# Altium PCB PCB.pcbdoc (part 3 of 3)
Units mil, origin at the board's own origin, x right, y up, seen from the top; angles counter-clockwise.
Board outline 1969.98 x 1969.75 mil, 6 copper layers (Top Layer, GND1, Inner2, PWR3, Inner4, Bottom Layer); 155 components, 199 nets, 988 pads, 612 vias.
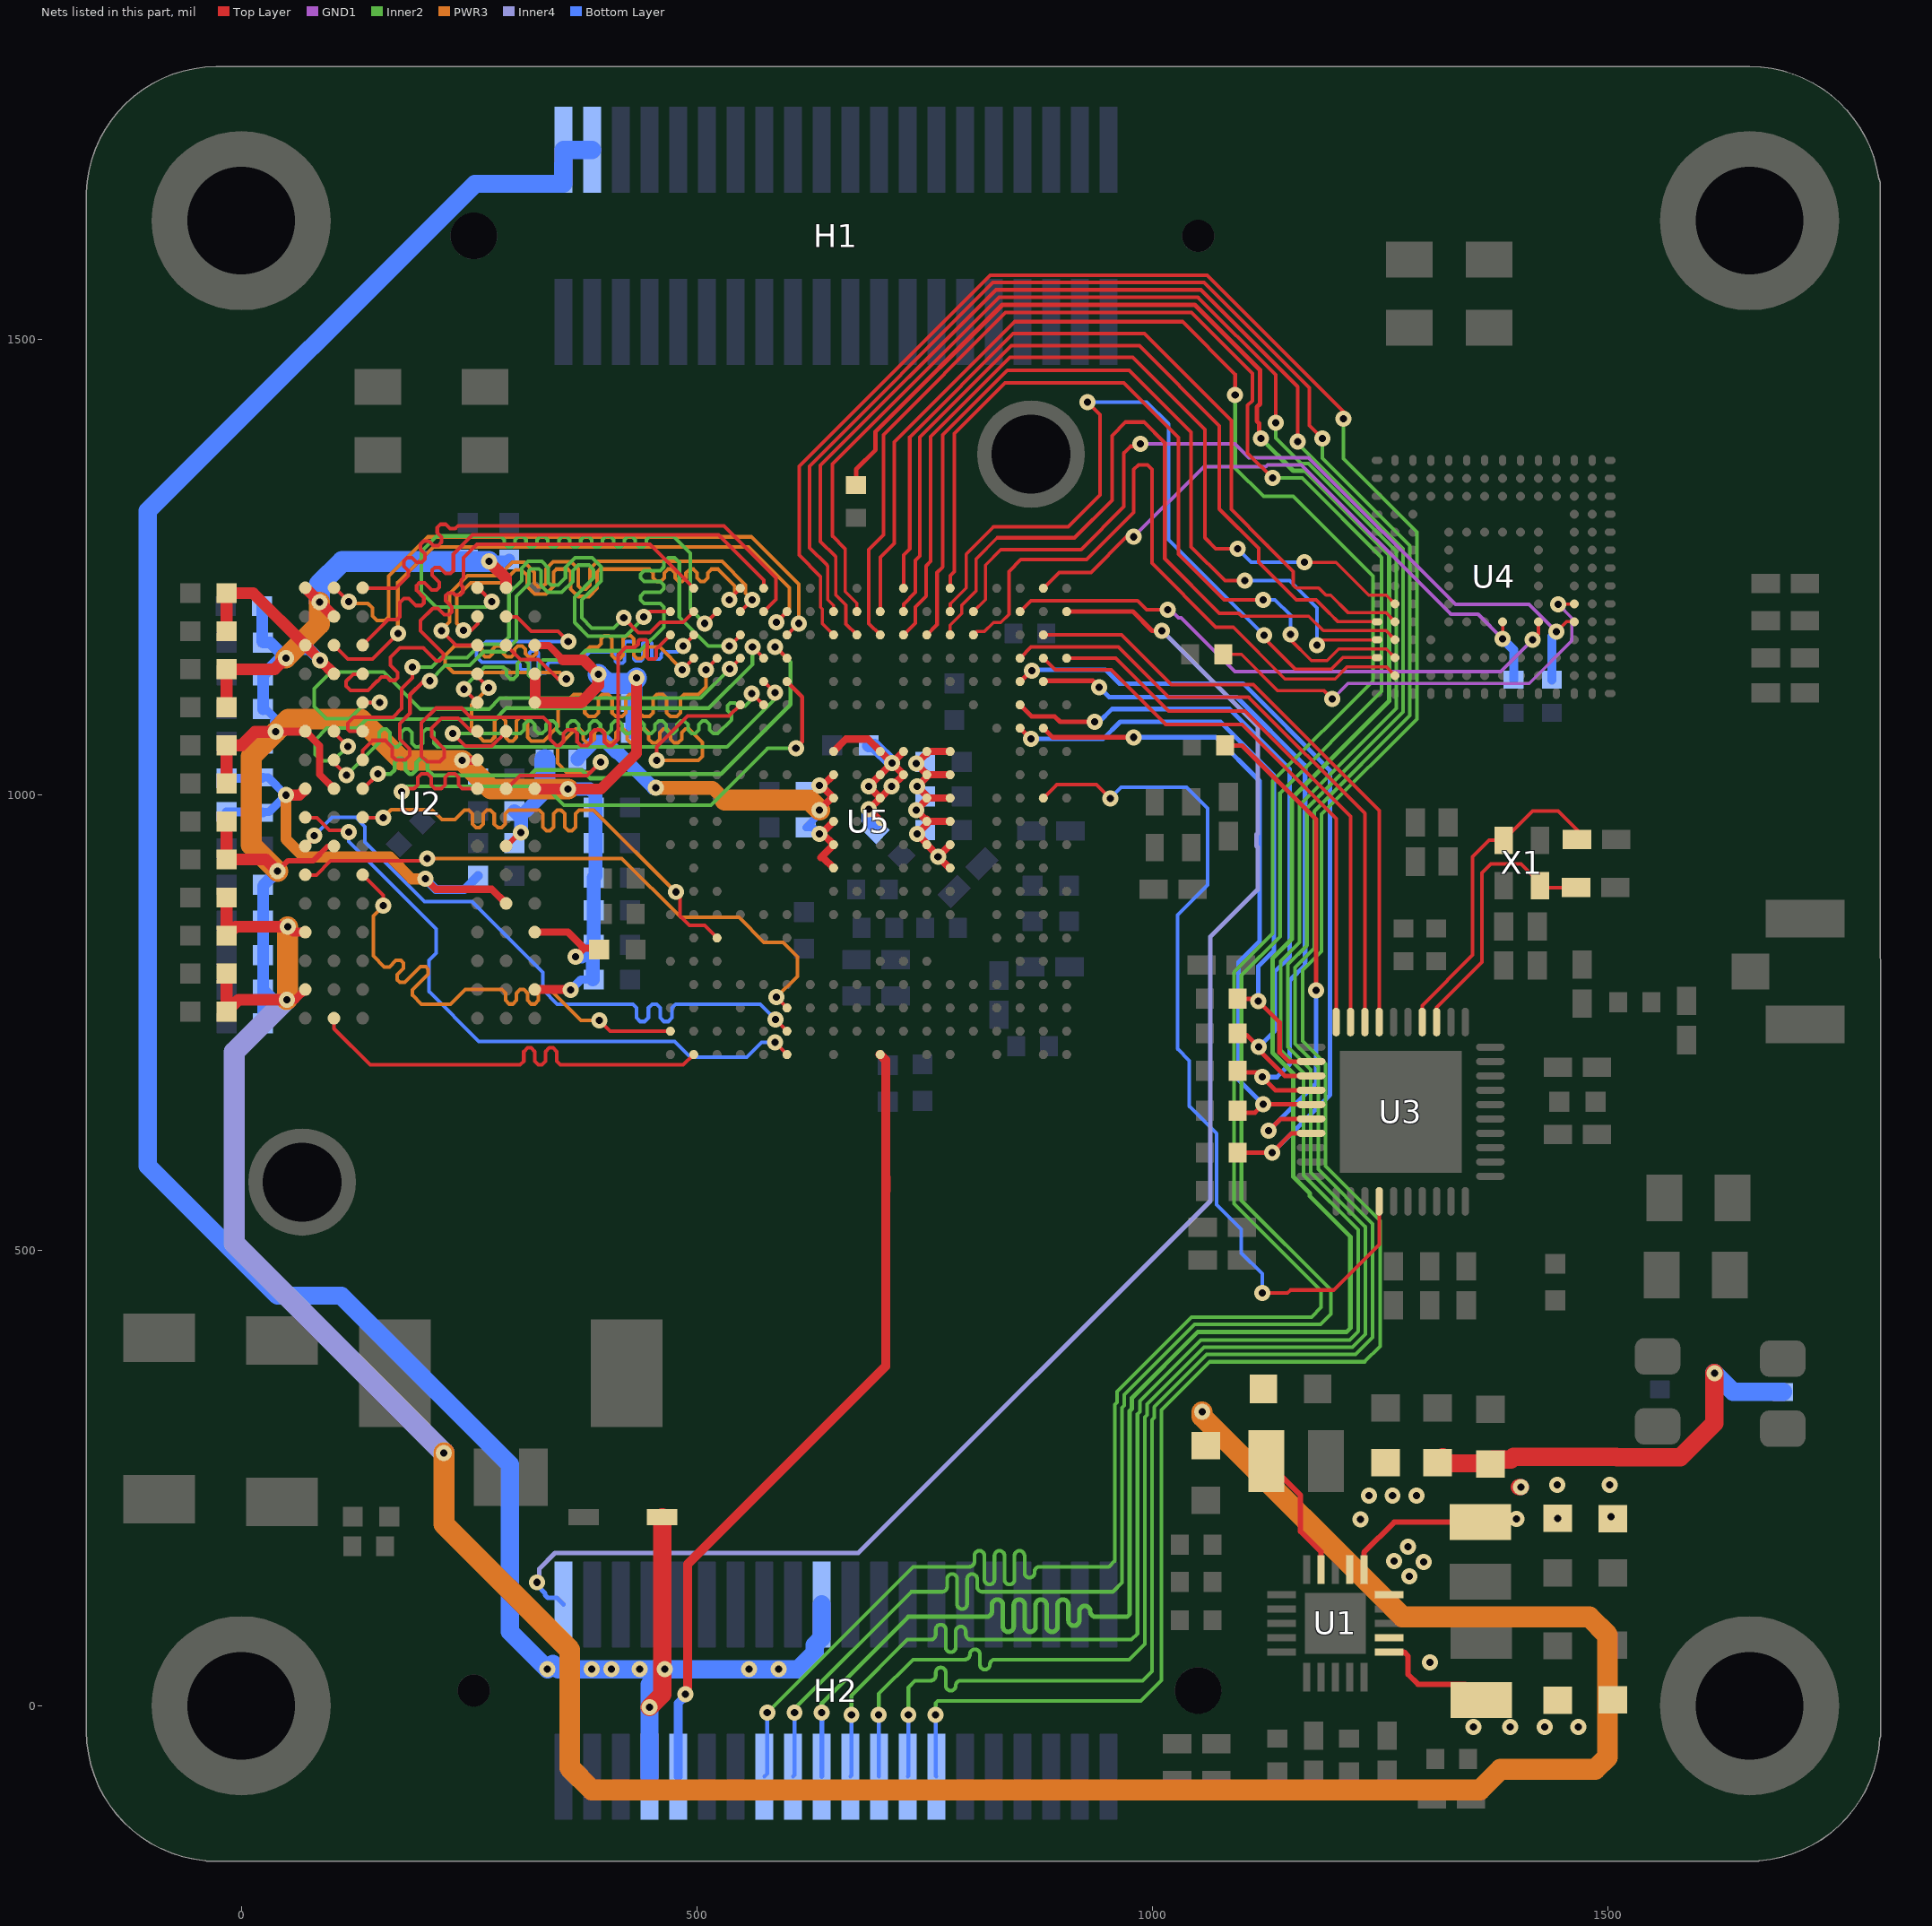
[diagram p7: the nets of this part, all layers, seen from the top]

## Via types
v1: diameter 17.7, hole 7.91, Top Layer to Bottom Layer, tented both sides, 612 vias

## Nets (pads, with @x,y where several pads share a name; then routed paths per layer and width w, separated by ;. In a path a pad name is that pad's centre, name@x,y a point inside that pad or via, vN(x,y) a via of type N, cw(c..) or ccw(c..) an arc to the next point about the centre after c; other vN are vias at no path point) (continued)
SCS1: U2.L1 U5.N19 | length 662.6
  Top Layer w4: U2.L1@70.72,911.72 82.46,911.72 97.95,927.22 201.22,927.22 v1(204,930) ; v1(587.68,777.63) U5.N19@599.26,766.06
  PWR3 w4: v1(204,930) 418,930 482.78,865.22 546.78,865.22 574,838 594.8,838 610.65,822.15 610.65,800.6 v1(587.68,777.63)
SDC0_CLK: H2.21 R13.1 | length 2998.1
  Top Layer w5: R13.1@675,1340 675,1357.02 696.5,1378.52 696.5,1398.52 835.62,1537.64 1046.88,1537.64 1118.5,1466.02 1118.5,1428.98 1115,1425.48 1115,1410.05 1117.5,1407.55 1117.5,1393.05 v1(1119.35,1391.2)
  Inner2 w5: v1(637.5,-7.5) 637.5,2.5 732.5,97.5 815.68,97.5 818.18,97.5 ccw(c818.18,103.5) 824.18,103.5 824.18,110.5 cw(c830.18,110.5) 836.18,110.5 836.18,87 ccw(c842.18,87) 848.18,87 848.18,110.5 cw(c854.18,110.5) 860.18,110.5 860.18,87 ccw(c866.18,87) 872.18,87 872.18,110.5 cw(c878.18,110.5) 884.18,110.5 884.18,87 ccw(c890.18,87) 896.18,87 896.18,110.5 cw(c902.18,110.5) 908.18,110.5 908.18,93.64 ccw(c914.18,93.64) 920.18,93.64 920.18,103.5 cw(c926.18,103.5) 932.18,103.5 ccw(c938.18,103.5) 938.18,97.5 972.5,97.5 975.5,100.5 975.5,323.66 977.98,326.15 977.98,337.94 1050.04,410 1213.33,410 1217.78,414.45 1217.78,514.72 1173.35,559.15 1173.35,562.36 1155,580.71 1155,693.99 1132.35,716.64 1132.35,820.33 1153.5,841.48 1153.5,996 1260.15,1102.65 1260.15,1263.66 1168.31,1355.5 1155.05,1355.5 v1(1119.35,1391.2)
  Bottom Layer w5: H2.21@637.24,-77.76 637.5,-77.5 v1(637.5,-7.5)
SDC0_CMD: H2.17 U5.K3 | length 2998.1
  Top Layer w3.5: 652,1262 653,1261 653,1219 664,1208
  Top Layer w4: 652,1262 636,1278 636,1361.36 828.79,1554.14 1053.71,1554.14 1160,1447.86 v1(1160,1387.5) ; 664,1208 664,1187.36 U5.K3@675.97,1175.4
  Inner2 w4: v1(700,-10) 700,13.14 737.5,50.64 792.5,50.64 794.5,50.64 ccw(c794.5,56.14) 800,56.14 800,56.39 cw(c805.5,56.39) 811,56.39 811,45.14 ccw(c816.5,45.14) 822,45.14 cw(c827.5,45.14) 827.5,50.64 957.5,50.64 975,50.64 992,67.64 992,316.83 994.48,319.31 994.48,331.11 1056.87,393.5 1220.17,393.5 1234.28,407.61 1234.28,525.59 1174.36,585.52 1174.36,697.97 1149.15,723.18 1149.15,813.79 1170,834.64 1170,985.13 1275.65,1090.78 1275.65,1270.08 1160,1385.73 v1(1160,1387.5)
  Bottom Layer w4: v1(700,-10) 700,-77.53 H2.17@700.23,-77.76
SDC0_D0: H2.23 U5.J3 | length 2998.7
  Top Layer w4: U5.J3@701.57,1175.4 689,1187.96 689,1269 705,1285 705,1395 839.14,1529.14 1043.36,1529.14 1110,1462.5 1110,1432.5 1105,1427.5 1105,1375 v1(1132.5,1347.5)
  Inner2 w4: v1(607.5,-7.5) 607.5,-3 735.5,125 769.5,125 ccw(c769.5,130.5) 775,130.5 775,139 cw(c780.5,139) 786,139 786,111.5 ccw(c791.5,111.5) 797,111.5 797,138.91 cw(c802.5,138.91) 808,138.91 808,130.5 ccw(c813.5,130.5) 813.5,125 956.91,125 967,135.09 967,327.19 969.48,329.67 969.48,341.46 1046.52,418.5 1185,418.5 1196.25,429.75 1196.25,456.25 1098.16,554.34 1098.16,801.84 1140.5,844.19 1140.5,1001.79 1252.15,1113.44 1252.15,1260.35 1165,1347.5 v1(1132.5,1347.5)
  Bottom Layer w4: H2.23@605.75,-77.76 607.5,-76.01 v1(607.5,-7.5)
SDC0_D1: H2.25 U5.J2 | length 2999.2
  Top Layer w4: U5.J2@701.57,1200.99 701.57,1260.57 717,1276 717,1387 849.24,1519.24 1033.26,1519.24 1091.25,1461.25 v1(1091.25,1438.75)
  Inner2 w4: v1(577.5,-7.5) 737.5,152.5 799.5,152.5 ccw(c799.5,158) 805,158 805,164.5 cw(c810.5,164.5) 816,164.5 816,138.5 ccw(c821.5,138.5) 827,138.5 827,164.5 cw(c832.5,164.5) 838,164.5 838,138.5 ccw(c843.5,138.5) 849,138.5 849,164.5 cw(c854.5,164.5) 860,164.5 860,145.94 ccw(c865.5,145.94) 871,145.94 871,147 cw(c876.5,147) 876.5,152.5 952.5,152.5 959,159 959,330.5 961.48,332.98 961.48,344.78 1043.2,426.5 1175,426.5 1185.59,437.09 1185.59,455.59 1090.16,551.03 1090.16,805.16 1132.5,847.5 1132.5,1015 1242.5,1125 1242.5,1240 1155,1327.5 1122.5,1327.5 1091.25,1358.75 v1(1091.25,1438.75)
  Bottom Layer w4: H2.25@574.25,-77.76 577.5,-74.51 v1(577.5,-7.5)
SDC0_D2: H2.13 U5.L3 | length 2998.3
  Top Layer w3.5: 635.5,1240 636,1239.5 636,1205.76 638,1203.76 638,1187.77 U5.L3@650.38,1175.4
  Top Layer w4: 635.5,1240 612.5,1263 612.5,1360.48 822.16,1570.14 1060.34,1570.14 1210,1420.48 v1(1210,1412.5)
  Inner2 w4: v1(762.5,-10) 762.5,2.66 764.84,5 987.5,5 1010.48,27.98 1010.48,324.48 1063.5,377.5 1233.46,377.5 1250.28,394.32 1250.28,532.22 1190.36,592.14 1190.36,704.6 1165.15,729.8 1165.15,807.17 1186,828.02 1186,978.5 1290.65,1083.15 1290.65,1288.06 1210,1368.71 v1(1210,1412.5)
  Bottom Layer w4: v1(762.5,-10) 762.5,-77.03 H2.13@763.23,-77.76
SDC0_D3: H2.15 U5.L2 | length 2998.3
  Top Layer w3.5: 643,1252 644,1251 644,1214 650.38,1207.62 U5.L2@650.38,1200.99
  Top Layer w4: 643,1252 624,1271 624,1360.67 825.47,1562.14 1057.03,1562.14 1172.5,1446.67 1172.5,1405.29 v1(1186.98,1390.81)
  Inner2 w4: v1(732.5,-10) 732.5,20.14 739.86,27.5 755,27.5 757,27.5 ccw(c757,33) 762.5,33 762.5,36.45 cw(c768,36.45) 773.5,36.45 773.5,22 ccw(c779,22) 784.5,22 cw(c790,22) 790,27.5 967.5,27.5 989.65,27.5 1000,37.85 1000,313.52 1002.48,316 1002.48,327.8 1060.19,385.5 1223.48,385.5 1242.28,404.3 1242.28,528.91 1182.36,588.83 1182.36,701.28 1157.15,726.49 1157.15,810.48 1178,831.33 1178,981.81 1283.15,1086.96 1283.15,1273.19 1186.98,1369.36 v1(1186.98,1390.81)
  Bottom Layer w4: H2.15@731.73,-77.76 732.5,-76.99 v1(732.5,-10)
SDC0_DET: H2.19 U5.K2 | length 2998.5
  Top Layer w3.5: 663,1270 663,1223 675.97,1210.03 U5.K2@675.97,1200.99
  Top Layer w4: 663,1270 649,1284 649,1363.04 832.1,1546.14 1050.4,1546.14 1135.65,1460.89 v1(1135.65,1408.15)
  Inner2 w4: v1(670,-10) 670,11.14 731.36,72.5 755,72.5 757,72.5 ccw(c757,78) 762.5,78 762.5,83.5 cw(c768,83.5) 773.5,83.5 773.5,64.14 ccw(c779,64.14) 784.5,64.14 784.5,81.41 cw(c790,81.41) 795.5,81.41 795.5,78 ccw(c801,78) 801,72.5 822.5,72.5 977.5,72.5 984,79 984,320.14 986.48,322.62 986.48,334.42 1053.56,401.5 1216.86,401.5 1226.28,410.92 1226.28,522.28 1166.36,582.2 1166.36,694.66 1141.15,719.86 1141.15,817.11 1162,837.96 1162,988.44 1268.15,1094.59 1268.15,1266.98 1171.63,1363.5 1163.71,1363.5 1135.65,1391.56 v1(1135.65,1408.15)
  Bottom Layer w4: H2.19@668.74,-77.76 670,-76.5 v1(670,-10)
SDC1_CLK: R14.1 U3.16 | length 549.1
  Top Layer w5: R14.1@1080,1054 1099,1054 1180,973 v1(1180,785) ; v1(1128,631) 1141.13,644.13 U3.16@1174.6,644.13
  Bottom Layer w5: v1(1128,631) 1180,683 v1(1180,785)
SDC1_CMD: R21.2 U3.12 U5.C7 | length 697.2
  Top Layer w5: U5.C7@855.11,1073.04 v1(867,1061.14) v1@867,1061 ; R21.2@1094,776 1114,776 1140,750 1140,717 1149.88,707.12 U3.12@1174.6,707.12
  Bottom Layer w5: v1(867,1061.14) 946.14,1061.14 965,1080 1075,1080 1134,1021 1134,937.01 ; v1(1116.78,773.22) 1116.78,811.78 1134,829 1134,934.65
SDC1_D0: R22.2 U3.13 U5.C6 | length 756.7
  Top Layer w5: U5.C6@855.11,1098.63 867.73,1086 893,1086 899,1080 v1(937,1080) ; R22.2@1094,736 1104,736 v1(1117,723) 1117,720 1145.63,691.37 U3.13@1174.6,691.37
  Bottom Layer w5: v1(937,1080) 942,1080 956,1094 1085,1094 1151,1028 1151,822 1135,806 1135,741 v1(1117,723)
SDC1_D1: R23.2 U3.14 U5.B5 | length 785.6
  Top Layer w5: U5.B5@880.7,1124.22 881.48,1125 935,1125 v1(942,1118) ; R23.2@1094,695 1116,695 1135.38,675.62 U3.14@1174.6,675.62
  Bottom Layer w5: v1(942,1118) 953,1107 1093,1107 1168,1032 1168,813 1151,796 1151,704 1137,690 v1(1121,690)
SDC1_D2: R24.2 U3.17 U5.C5 | length 927
  Top Layer w5: U5.C5@855.11,1124.22 855.64,1124.22 867.44,1136.02 v1(867.98,1136.02) ; R24.2@1094.01,608 1095.01,607 v1(1132,607) 1153.38,628.38 U3.17@1174.6,628.38
  Bottom Layer w5: v1(867.98,1136.02) 868.96,1137 949,1137 964,1122 1100,1122 1195.35,1026.65 1195.35,670.35 v1(1132,607)
SDC1_D3: R25.2 U3.15 U5.B7 | length 721.4
  Top Layer w5: U5.B7@880.7,1073.04 890.73,1063 v1(980,1063) ; R25.2@1094,651 1113,651 v1(1122,660) 1174.47,660 U3.15@1174.6,659.87
  Bottom Layer w5: v1(980,1063) 1070,1063 1118,1015 1118,839 1095,816 1095,687 v1(1122,660)
SDC2_CLK: R12.1 U4.M6 | length 493.8
  Top Layer w3.5: R12.1@1078,1154 1098,1154 1138,1114 1189,1114 v1(1198,1105) ; v1(1446,1209) 1463.11,1209 U4.M6@1463.59,1209.48
  GND1 w3.5: v1(1198,1105) 1215,1122 1414,1122 1461,1169 1461,1194 v1(1446,1209)
SDC2_CMD: R50.2 U4.M5 U5.E2 | length 937.5
  Top Layer w3.5: U5.E2@803.93,1200.99 817,1214.06 817,1252 834,1269 ; v1(1444,1179) 1454.78,1189.78 U4.M5@1463.59,1189.78
  Top Layer w4: 834,1269 922,1269 969,1316 969,1375 976.38,1382.38 984.53,1382.38 v1(987.15,1385)
  GND1 w4: v1(987.15,1385) 1091.21,1385 1106.17,1370.04 1115,1370.04 1171.96,1370.04 1333,1209 1414,1209 v1(1444,1179)
  Bottom Layer w10: R50.2@1439,1126 1439,1174 v1(1444,1179)
SDC2_D0: U4.A3 U5.F2 | length 872.8
  Top Layer w3.5: 778.34,1209.34 796,1227 796,1264 826,1294 ; v1(1123,1175) 1123,1172 1157,1138 1197,1138 1209.41,1150.41 U4.A3@1247.05,1150.41
  Top Layer w4: U5.F2@778.34,1200.99 778.34,1209.34 ; 826,1294 908,1294 943,1329 943,1417 v1(929,1431)
  Bottom Layer w4: v1(929,1431) 994,1431 1018,1407 1018,1280 v1(1123,1175)
SDC2_D1: U4.A4 U5.G3 | length 958.5
  Top Layer w3.5: v1(1181,1164) 1187,1170 1246.94,1170 U4.A4@1247.05,1170.1
  Top Layer w4: U5.G3@752.75,1175.4 764,1186.65 764,1244 770,1250 770,1394.75 841.25,1466 975,1466 1043,1398 1043,1272 1080,1235 v1(1102,1235)
  Bottom Layer w4: v1(1102,1235) 1151,1235 1181,1205 v1(1181,1164)
SDC2_D2: U4.A5 U5.H2 | length 930.6
  Top Layer w3.5: 1195,1199 1204.22,1189.78 U4.A5@1247.05,1189.78
  Top Layer w4: U5.H2@727.16,1200.99 727.16,1209.16 740,1222 740,1257 745,1262 745,1392.37 845.63,1493 986,1493 1074,1405 1074,1313.5 1117.2,1270.3 1117.2,1255.08 1158.27,1214 1180,1214 1195,1199
SDC2_D3: U4.B2 U5.E3 | length 762.4
  Top Layer w3.5: 807.53,1179 816,1179 826,1189 834,1189 843,1198 843,1245 ; 1089,1184 1146,1127 1201,1127 1214.46,1140.46 1257.01,1140.46 U4.B2@1266.73,1130.73
  Top Layer w4: U5.E3@803.93,1175.4 807.53,1179 ; 843,1245 856,1258 928,1258 980,1310 980,1357 985,1362 995,1362 1000,1357 1000,1254 1070,1184 1089,1184
SDC2_D4: U4.B3 U5.F1 | length 905
  Top Layer w3.5: v1(1152,1176) 1152,1170 1175,1147 1192,1147 1205,1160 1257.15,1160 U4.B3@1266.73,1150.41
  Top Layer w4: U5.F1@778.34,1226.59 778.34,1240.34 783,1245 783,1396.43 838.57,1452 969,1452 1029,1392 1029,1264 1079,1214 v1(1122,1214)
  Bottom Layer w4: v1(1122,1214) 1135,1214 1152,1197 v1(1152,1176)
SDC2_D5: U4.B4 U5.F3 | length 832.3
  Top Layer w3.5: U5.F3@778.34,1175.4 778.34,1186.14 791,1198.8 791,1208 807,1224 807,1259 830,1282 ; 1098.21,1196 1172,1196 1188,1180 1256.84,1180 U4.B4@1266.73,1170.1
  Top Layer w4: 830,1282 915,1282 956,1323 956,1394 971,1409 991,1409 1014,1386 1014,1259 1074,1199 1095.21,1199 1098.21,1196
SDC2_D6: U4.B5 U5.H1 | length 945.5
  Top Layer w3.5: 1155,1230 1158,1227 1183,1227 1191,1219 1196,1219 1215,1200 1256.52,1200 U4.B5@1266.73,1189.78
  Top Layer w4: U5.H1@727.16,1226.59 727.16,1263.16 734,1270 734,1392.69 847.31,1506 991.58,1506 1087,1410.58 1087,1313.23 1126.2,1274.03 1126.2,1273.8 1155,1245 1155,1230
SDC2_D7: U4.B6 U5.H3 | length 957.7
  Top Layer w3.5: v1(1167.18,1255.15) 1167.32,1255 1202,1255 1238,1219 1257.21,1219 U4.B6@1266.73,1209.48
  Top Layer w4: U5.H3@727.16,1175.4 740,1188.24 740,1206 752,1218 752,1251 757,1256 757,1393.06 843.94,1480 979,1480 1058,1401 1058,1282 1070,1270 v1(1093.85,1270)
  Bottom Layer w4: v1(1093.85,1270) 1108.85,1255 1167.03,1255 v1(1167.18,1255.15)
SDC2_DS: R51.2 U4.H5 U5.B1 | length 708.4
  Top Layer w3.5: U4.H5@1384.85,1189.78 1385,1189.63 v1(1385,1171)
  Top Layer w4: U5.B1@880.7,1226.59 898.11,1244 933,1244 972,1283 v1(980,1283)
  GND1 w4: v1(980,1283) 1057,1360 1115,1360 1124.71,1360 1126.74,1362.04 1163.96,1362.04 1328,1198 1358,1198 v1(1385,1171)
  Bottom Layer w10: v1(1385,1171) 1397,1159 R51.2@1397,1126
SDC2_RST: U4.K5 U5.C2 | length 637
  Top Layer w3.5: v1(1418,1170) 1424.22,1176.22 U4.K5@1424.22,1189.78
  Top Layer w4: U5.C2@855.11,1200.99 867.12,1213 984,1213 994,1203 v1(1017.15,1203)
  GND1 w4: v1(1017.15,1203) 1020.17,1203 1029.16,1194.01 1031.99,1194.01 1091,1135 1383,1135 v1(1418,1170)
SDQ0: U2.A2 U5.N3 | length 676.8
  Top Layer w4: U2.A2@102.21,1226.68 103.32,1226.68 v1(118,1212) ; U5.N3@599.26,1175.5 599.5,1175.5 v1(612,1188)
  PWR3 w4: v1(118,1212) 120,1210 139,1210 144,1205 144,1196 149,1191 158,1191 162,1195 162,1240 205,1283 560,1283 612,1231 v1(612,1188)
SDQ1: U2.C8 U5.U4 | length 657.5
  Top Layer w4: U2.C8@291.19,1163.69 306.42,1148.46 326.28,1148.46 347.75,1127 v1(357,1127) ; v1@484.27,1137.28 U5.U4@496.9,1149.91
  PWR3 w4: v1(357,1127) 350,1134 233,1134 224,1143 224,1153 234,1163 260.53,1163 264.03,1159.5 264.03,1154.88 267.53,1151.38 272.53,1151.38 276.03,1154.88 276.03,1159.5 279.53,1163 284.53,1163 288.03,1159.5 288.03,1154.88 291.53,1151.38 296.53,1151.38 300.03,1154.88 300.03,1159.5 303.53,1163 308.53,1163 312.03,1159.5 312.03,1154.88 315.53,1151.38 320.53,1151.38 324.03,1154.88 324.03,1159.5 327.53,1163 340,1163 352,1151 372,1151 383,1162 391.64,1162 395.14,1165.5 395.14,1171.02 398.64,1174.52 403.64,1174.52 407.14,1171.02 407.14,1152.98 410.64,1149.48 415.64,1149.48 419.14,1152.98 419.14,1171.02 422.64,1174.52 427.64,1174.52 431.14,1171.02 431.14,1152.98 434.64,1149.48 439.64,1149.48 443.14,1152.98 443.14,1158.5 446.64,1162 459.48,1162 v1(484.27,1137.22)
  other v1: 484.27,1137.22
SDQ2: U2.C2 U5.N2 | length 668.9
  Top Layer w4: U2.C2@102.21,1163.69 116.9,1149 144,1149 v1(172,1177) ; v1(587.39,1189.22) U5.N2@599.26,1201.09
  PWR3 w4: v1(172,1177) 172,1233 211,1272 557,1272 602,1227 602,1203.83 v1(587.39,1189.22)
SDQ3: U2.D7 U5.T4 | length 647.1
  Top Layer w4: U2.D7@259.69,1132.19 259.69,1129.19 v1(271.7,1117.18) ; v1(510.27,1137.22) 510.27,1137.69 U5.T4@522.49,1149.91
  PWR3 w4: v1(271.7,1117.18) 253,1098.48 253,1072 266,1059 274.25,1059 278.25,1063 278.25,1081 282.25,1085 286.25,1085 290.25,1081 290.25,1063 294.25,1059 298.25,1059 302.25,1063 302.25,1081 306.25,1085 310.25,1085 314.25,1081 314.25,1063 318.25,1059 332,1059 348,1075 348,1093 365,1110 373.19,1110 377.19,1106 377.19,1090 381.19,1086 388.19,1086 392.19,1090 392.19,1106 396.19,1110 403.19,1110 407.19,1106 407.19,1090 411.19,1086 418.19,1086 422.19,1090 422.19,1106 426.19,1110 433.19,1110 437.19,1106 437.19,1090 441.19,1086 448.19,1086 452.19,1090 452.19,1106 456.19,1110 463.19,1110 467.19,1106 467.19,1090 471.19,1086 478.19,1086 482.19,1090 482.19,1106 486.19,1110 502,1110 510.27,1118.27 v1(510.27,1137.22)
  other v1: 510.27,1137.22 510.27,1137.22 510.27,1137.22
SDQ4: U2.B8 U5.U3 | length 588.5
  Top Layer w4: U2.B8@291.19,1195.19 302.61,1195.19 318.58,1179.22 347.78,1179.22 v1(359,1168) ; v1(485,1163) 496.9,1174.9 U5.U3@496.9,1175.5
  Bottom Layer w4: v1(359,1168) 269.05,1168 258.27,1157.22 258.27,1151.38 264.11,1145.53 303.94,1145.53 306.28,1143.19 306.28,1139.1 308.28,1137.1 314.28,1137.1 316.28,1139.1 316.28,1155.53 318.28,1157.53 324.28,1157.53 326.28,1155.53 326.28,1135.53 328.28,1133.53 334.28,1133.53 336.28,1135.53 336.28,1143.19 338.63,1145.53 371.77,1145.53 382.86,1156.62 408.58,1156.62 410.92,1154.27 410.92,1146.62 412.92,1144.62 418.92,1144.62 420.92,1146.62 420.92,1166.03 422.92,1168.03 428.92,1168.03 430.92,1166.03 430.92,1149.13 432.92,1147.13 438.92,1147.13 440.92,1149.13 440.92,1166.03 442.92,1168.03 448.92,1168.03 450.92,1166.03 450.92,1150.96 452.92,1148.96 458.92,1148.96 460.92,1150.96 460.92,1154.27 463.27,1156.62 478.62,1156.62 v1(485,1163)
SDQ5: U2.C3 U5.P1 | length 602.6
  Top Layer w4: U2.C3@133.37,1164.08 161.29,1192 171,1192 174,1195 174,1211 178.52,1215.52 184.18,1215.52 192.02,1207.68 197.68,1207.68 200.51,1210.51 200.51,1216.17 192.67,1224.01 192.67,1229.67 195.5,1232.5 201.15,1232.5 209,1224.65 214.65,1224.65 217.48,1227.48 217.48,1233.14 209.64,1240.98 209.64,1246.64 212.47,1249.47 218.12,1249.47 224.59,1243 230,1243 233,1246 233,1264 254,1285 524,1285 573.61,1235.39 U5.P1@573.61,1226.59
SDQ6: U2.A7 U5.T2 | length 668.6
  Top Layer w4: U2.A7@258.56,1226.93 260.07,1226.93 v1(275,1212) ; v1(509,1188) 509.4,1188 U5.T2@522.49,1201.09
  Inner2 w4: v1(275,1212) 269,1206 214,1206 198,1222 198,1267 215,1284 284.75,1284 288.75,1280 288.75,1276 292.75,1272 296.75,1272 300.75,1276 300.75,1280 304.75,1284 308.75,1284 312.75,1280 312.75,1276 316.75,1272 320.75,1272 324.75,1276 324.75,1280 328.75,1284 332.75,1284 336.75,1280 336.75,1276 340.75,1272 344.75,1272 348.75,1276 348.75,1280 352.75,1284 356.75,1284 360.75,1280 360.75,1276 364.75,1272 368.75,1272 372.75,1276 372.75,1280 376.75,1284 380.75,1284 384.75,1280 384.75,1276 388.75,1272 392.75,1272 396.75,1276 396.75,1280 400.75,1284 404.75,1284 408.75,1280 408.75,1276 412.75,1272 416.75,1272 420.75,1276 420.75,1280 424.75,1284 428.75,1284 432.75,1280 432.75,1276 436.75,1272 440.75,1272 444.75,1276 444.75,1280 448.75,1284 474,1284 493,1265 493,1204 v1(509,1188)
  other v1: 509,1188 275,1212
SDQ7: U2.A3 U5.P2 | length 608.7
  Top Layer w4: U2.A3@133.71,1226.68 169.68,1226.68 183.33,1240.33 183.33,1245.98 178.48,1250.83 178.48,1256.48 182.02,1260.02 187.68,1260.02 192.52,1255.18 198.18,1255.18 201.71,1258.71 201.71,1264.37 196.87,1269.21 196.87,1274.87 200.4,1278.4 206.06,1278.4 210.9,1273.56 216.56,1273.56 220.1,1277.1 220.1,1282.75 215.25,1287.6 215.25,1293.25 218.79,1296.79 224.44,1296.79 229.29,1291.94 234.94,1291.94 238,1295 530,1295 587,1238 587,1214.27 585.27,1212.53 585.11,1212.53 U5.P2@573.67,1201.09
SDQ8: U2.G2 U5.P5 | length 642.7
  Top Layer w4: U2.G2@98.96,1037.95 v1(115.45,1021.46) ; U5.P5@573.68,1124.32 v1(586,1112)
  Inner2 w4: v1(115.45,1021.46) 151.44,1057.45 151.44,1068 155.44,1072 159.44,1072 163.44,1068 163.44,1056.22 167.44,1052.22 171.44,1052.22 175.44,1056.22 175.44,1068 179.44,1072 183.44,1072 187.44,1068 187.44,1056.22 191.44,1052.22 195.44,1052.22 199.44,1056.22 199.44,1068 203.44,1072 207.44,1072 211.44,1068 211.44,1056.22 215.44,1052.22 533.22,1052.22 586,1105 v1(586,1112)
  other v1: 586,1112
SDQ9: U2.F7 U5.V3 | length 661.6
  Top Layer w4: U2.F7@259.37,1069.58 252.42,1069.58 238,1084 220,1084 209,1073 209,1064 223,1050 223,1041 218,1036 204,1036 198,1042 198,1079 214,1095 242,1095 252,1085 331.72,1085 339,1077.72 339,1061 346,1054 349.85,1054 353.85,1058 353.85,1067.22 357.85,1071.22 364.85,1071.22 368.85,1067.22 368.85,1058 372.85,1054 379.85,1054 383.85,1058 383.85,1067.22 387.85,1071.22 394.85,1071.22 398.85,1067.22 398.85,1058 402.85,1054 407,1054 414,1061 414,1153.45 422.16,1161.61 432.24,1161.61 435.75,1165.13 435.75,1168.34 437.25,1169.84 444.25,1169.84 445.75,1168.34 445.75,1150.46 447.25,1148.96 454.25,1148.96 455.75,1150.46 455.75,1159.75 U5.V3@471.31,1175.31
SDQ10: U2.F2 U5.P4 | length 635.8
  Top Layer w4: U2.F2@102.04,1069.45 102.04,1067.96 v1(117,1053) ; v1(561.27,1162.31) U5.P4@573.67,1149.91
  Inner2 w4: v1(117,1053) 101,1037 88,1037 81,1044 81,1060 94,1073 128,1073 138,1083 279,1083 291,1095 513.46,1095 561.27,1142.8 v1(561.27,1162.31)
SDQ11: U2.E3 U5.R4 | length 641.4
  Top Layer w4: U2.E3@130.46,1100.94 v1(152.18,1100.94) ; v1(536.39,1138.22) U5.R4@548.08,1149.91
  Inner2 w4: v1(152.18,1100.94) 136.68,1100.94 119.27,1083.53 93.27,1083.53 80.27,1096.53 80.27,1116.53 98.27,1134.53 156.47,1134.53 197,1094 272,1094 284,1106 504.17,1106 v1(536.39,1138.22)
SDQ12: U2.H8 U5.R6 | length 658.9
  Top Layer w4: U2.H8@291.19,1006.21 305.98,1021 379.73,1021 394.51,1035.78 v1(394.59,1035.78) ; v1(456.27,1037.53) 456.27,1052.22 490.27,1086.22 535.57,1086.22 U5.R6@548.08,1098.73
  PWR3 w4: v1(394.59,1035.78) 394.51,1035.78 383.27,1024.53 357.27,1024.53 347.27,1034.53 347.27,1052.22 367.05,1072 371.53,1072 375.53,1068 375.53,1061 379.53,1057 383.53,1057 387.53,1061 387.53,1068 391.53,1072 395.53,1072 399.53,1068 399.53,1061 403.53,1057 407.53,1057 411.53,1061 411.53,1068 415.53,1072 419.53,1072 423.53,1068 423.53,1061 427.53,1057 431.53,1057 435.53,1061 435.53,1068 439.53,1072 443.53,1072 447.53,1068 447.53,1061 451.53,1057 455.53,1057 459.53,1061 459.53,1068 463.53,1072 467.53,1072 471.53,1068 471.53,1061 475.53,1057 479.53,1057 483.53,1061 483.53,1068 487.53,1072 491.8,1072 506.27,1057.53 506.27,1042.03 501.77,1037.53 v1(456.27,1037.53)
  other v1: 456.27,1037.53
SDQ13: U2.H3 U5.N4 | length 652.7
  Top Layer w4.5: U2.H3@133.71,1006.21 v1(150.27,1022.77) ; v1(586.27,1162.22) 586.94,1162.22 U5.N4@599.26,1149.91
  Inner2 w4.5: v1(150.27,1022.77) 163.91,1022.77 168.41,1027.27 168.41,1035.5 172.91,1040 175.91,1040 180.41,1035.5 180.41,1027.27 184.91,1022.77 187.91,1022.77 192.41,1027.27 192.41,1035.5 196.91,1040 199.91,1040 204.41,1035.5 204.41,1027.27 210.68,1021 317,1021 323,1027 374,1027 383,1018 404,1018 408.77,1022.77 526.77,1022.77 603,1099 603,1145.48 v1(586.27,1162.22)
  other v1: 586.27,1162.22
SDQ14: U2.F8 U5.P6 | length 620.7
  Top Layer w4: v1(232.27,1067.22) 246.27,1053.22 275.2,1053.22 U2.F8@291.19,1069.2 ; v1(560.73,1111.08) 573.08,1098.73 U5.P6@573.67,1098.73
  Inner2 w4: v1(232.27,1067.22) 306.42,1067.22 310.42,1071.22 310.42,1077 314.42,1081 318.42,1081 322.42,1077 322.42,1071.22 326.42,1067.22 330.42,1067.22 334.42,1071.22 334.42,1077 338.42,1081 342.42,1081 346.42,1077 346.42,1071.22 350.42,1067.22 354.42,1067.22 358.42,1071.22 358.42,1077 362.42,1081 366.42,1081 370.42,1077 370.42,1071.22 374.42,1067.22 378.42,1067.22 382.42,1071.22 382.42,1077 386.42,1081 390.42,1081 394.42,1077 394.42,1071.22 398.42,1067.22 402.42,1067.22 406.42,1071.22 406.42,1077 410.42,1081 414.42,1081 418.42,1077 418.42,1071.22 422.42,1067.22 426.42,1067.22 430.42,1071.22 430.42,1077 434.42,1081 438.42,1081 442.42,1077 442.42,1071.22 446.42,1067.22 450.42,1067.22 454.42,1071.22 454.42,1077 458.42,1081 462.42,1081 466.42,1077 466.42,1071.22 470.42,1067.22 474.42,1067.22 478.42,1071.22 478.42,1077 482.42,1081 486.42,1081 490.42,1077 490.42,1071.22 494.42,1067.22 498.42,1067.22 502.42,1071.22 502.42,1077 506.42,1081 510.42,1081 514.42,1077 514.42,1071.22 518.42,1067.22 523.22,1067.22 538.19,1082.19 538.19,1087.85 533.9,1092.14 533.9,1097.79 536.73,1100.62 542.38,1100.62 545.89,1097.12 553.12,1097.12 561.62,1105.62 v1@561.62,1109.82
  other v1: 232.27,1067.22
SDQ15: U2.H7 U5.N5 | length 683.7
  Top Layer w4: v1(176,1003) 179.58,1006.58 189.69,1006.58 193.69,1010.58 193.69,1018.77 197.69,1022.77 204.69,1022.77 208.69,1018.77 208.69,1010.58 212.69,1006.58 219.69,1006.58 223.69,1010.58 223.69,1018.77 227.69,1022.77 234.69,1022.77 238.69,1018.77 238.69,1010.58 242.69,1006.58 U2.H7@259.37,1006.58
  Top Layer w4.5: U5.N5@599.2,1124.22 616,1107.41 616,1058 v1(609,1051)
  Inner2 w4: v1(176,1003) 182,1009 334,1009 354.38,988.62 515.62,988.62 578,1051 v1(609,1051)
  other v1: 176,1003
SDQM0: U2.D3 U5.U1 | length 648.5
  Top Layer w4: U2.D3@133.71,1132.19 U2.D3@130.46,1132.19 ; U2.D3@133.71,1132.44 U2.D3@130.46,1132.19 ; U5.U1@496.9,1226.69 448.58,1275 259,1275 244,1260 244,1238 241.47,1235.47 241.47,1229.81 243.33,1227.95 243.33,1222.29 240.5,1219.46 234.85,1219.46 232.98,1221.33 227.33,1221.33 224.5,1218.5 224.5,1212.84 231.2,1206.14 231.2,1200.48 228.37,1197.65 222.71,1197.65 216.01,1204.36 210.36,1204.36 197,1191 197,1180 222,1155 222,1151 218,1147 214,1147 200,1161 174,1161 164,1151 164,1141.83 171.83,1134 171.83,1128.34 169,1125.51 163.34,1125.51 159.76,1129.1 154.1,1129.1 149.4,1124.4 149.27,1124.53 139.27,1114.53 119.87,1114.53 115.27,1119.14 115.27,1124.53 122.93,1132.19 U2.D3@130.46,1132.19
SDQM1: U2.E7 U5.R3 | length 646.4
  Top Layer w4: v1(244.71,1115.68) U2.E7@259.69,1100.7 ; v1(536,1163) 548.08,1175.08 U5.R3@548.08,1175.5
  Inner2 w4: v1(244.71,1115.68) 244.71,1117.71 267,1140 288,1140 291.26,1136.74 291.26,1131 295.26,1127 299.26,1127 303.26,1131 303.26,1144 307.26,1148 311.26,1148 315.26,1144 315.26,1131 319.26,1127 323.26,1127 327.26,1131 327.26,1144 331.26,1148 368,1148 378,1158 438,1158 464,1184 464,1206.01 460,1210.01 442.28,1210.01 438.28,1214.01 438.28,1218.01 442.28,1222.01 460,1222.01 464,1226.01 464,1230.01 460,1234.01 442.28,1234.01 438.28,1238.01 438.28,1242.01 442.28,1246.01 460,1246.01 464,1250.01 464,1255 469,1260 476,1260 481,1255 481,1195 513,1163 v1(536,1163)
  other v1: 244.71,1115.68 536,1163
SDQS0N: U2.B7 U5.R1 | length 563.9
  Top Layer w4: v1(244.27,1180.53) 252.27,1180.53 259.69,1187.96 U2.B7@259.69,1195.19 ; v1(536,1214) 536,1214.61 U5.R1@548.08,1226.69
  PWR3 w4: v1(244.27,1180.53) 236.77,1188.03 236.77,1217.28 252.02,1232.53 286.67,1232.53 301.14,1247 307.61,1247 313.87,1240.73 313.87,1228.81 322.31,1220.38 334.69,1220.38 342.87,1228.56 342.87,1244.48 345.93,1247.53 358.82,1247.53 361.87,1244.48 361.87,1225.81 370.15,1217.53 381.85,1217.53 390.87,1226.56 390.87,1244.48 393.93,1247.53 448.38,1247.53 452.38,1243.53 452.38,1238.01 456.38,1234.01 460.38,1234.01 464.38,1238.01 464.38,1243.53 468.38,1247.53 472.38,1247.53 476.38,1243.53 476.38,1238.01 480.38,1234.01 484.38,1234.01 488.38,1238.01 488.38,1243.53 492.38,1247.53 496.38,1247.53 500.38,1243.53 500.38,1238.01 504.38,1234.01 508.38,1234.01 512.38,1238.01 512.38,1243.53 516.38,1247.53 523.47,1247.53 542,1229 542,1220 v1(536,1214)
  other v1: 536,1214
SDQS0P: U2.C7 U5.R2 | length 562.8
  Top Layer w4: v1(220,1180) 235.92,1164.08 U2.C7@259.37,1164.08 ; U5.R2@548.02,1200.99 v1(561,1214)
  PWR3 w4: v1(220,1180) 220,1181 228.77,1189.77 228.77,1220.59 248.71,1240.53 283.36,1240.53 297.82,1255 310.92,1255 321.87,1244.05 321.87,1232.13 325.62,1228.38 331.38,1228.38 334.87,1231.87 334.87,1247.79 342.62,1255.53 362.13,1255.53 369.87,1247.79 369.87,1229.13 373.47,1225.53 378.53,1225.53 382.87,1229.87 382.87,1247.79 391.08,1256 528,1256 553.77,1230.23 553.77,1221.23 v1(561,1214)
SDQS1N: U2.G3 U5.V2 | length 686.2
  Top Layer w4: U2.G3@133.37,1038.08 133.37,1048.63 144.27,1059.53 158.47,1059.53 166,1052 166,1042 170,1038 180,1038 185,1043 185,1050 174,1061 174,1078.12 185.27,1089.39 185.27,1090.17 ; 185.27,1090.53 185.27,1109.75 200.52,1125 v1(207,1125) ; v1(442,1195) 448.09,1201.09 U5.V2@471.31,1201.09
  Inner2 w4: v1(207,1125) 224,1142 251,1142 266,1157 289.31,1157 302,1169.69 302,1217.69 316,1231.69 316,1245.69 318.31,1248 326.69,1248 329,1245.69 329,1229.69 336.69,1222 352,1222 364,1234 364,1246 370,1252 382,1252 387,1247 387,1238 366,1217 366,1189 381,1174 422,1174 442,1194 v1(442,1195)
SDQS1P: U2.F3 U5.U2 | length 687.6
  Top Layer w4: U2.F3@133.32,1069.53 119.27,1069.53 117.27,1071.53 117.27,1078.53 123.73,1085 166.73,1085 176.27,1094.53 176.27,1116.31 188,1128.04 v1(188,1140) ; v1(420,1194) 436,1178 449,1178 460.22,1189.22 485.03,1189.22 U5.U2@496.9,1201.09
  Inner2 w4: v1(188,1140) 209,1140 219.5,1150.5 247.89,1150.5 262.39,1165 286,1165 294,1173 294,1221 308,1235 308,1249 315,1256 330,1256 337,1249 337,1233 340,1230 348,1230 356,1238 356,1249.31 366.69,1260 385.31,1260 395,1250.31 395,1234.69 374,1213.69 374,1194 385,1183 409,1183 v1(420,1194)
SODT0: U2.K1 U5.N20 | length 718.7
  Top Layer w4: U2.K1@70.72,943.22 80,952.5 v1(80,955) ; v1(586.5,753.22) U5.N20@599.26,740.47
  Bottom Layer w4: v1(80,955) 100,975 126,975 136,965 136,948 201.47,882.53 253.47,882.53 331,805 331,786 347,770 430.08,770 434.08,766 434.08,755 438.08,751 443.08,751 447.08,755 447.08,766 451.08,770 456.08,770 460.08,766 460.08,755 464.08,751 469.08,751 473.08,755 473.08,766 477.08,770 569.72,770 v1(586.5,753.22)
  other v1: 80,955
SODT1: U2.J1 U5.N21 | length 707.5
  Top Layer w4: U2.J1@70.72,974.71 83.29,974.71 97,961 116,961 v1(118,959) ; v1(586,728) 585.9,728.1 585.9,728.22 U5.N21@599.26,714.87
  Bottom Layer w4: v1(118,959) 118,948.51 214,852.51 214,826 206,818 206,784 261,729 476,729 493,712 555.15,712 571.15,728 v1(586,728)
SRAS: U2.J3 U5.T16 | length 601.8
  Top Layer w4: U2.J3@133.71,974.71 v1(155.77,974.71) ; v1(477.27,893.22) 481.75,888.74 481.75,867.05 492.27,856.53 508.78,856.53 U5.T16@522.49,842.83
  PWR3 w4: v1(155.77,974.71) 164.59,983.53 209.27,983.53 220.27,972.53 234.53,972.53 245,983 249.77,983 253.77,979 253.77,967.67 257.77,963.67 261.77,963.67 265.77,967.67 265.77,979 269.77,983 273.77,983 277.77,979 277.77,967.67 281.77,963.67 285.77,963.67 289.77,967.67 289.77,979 293.77,983 327.11,983 331.11,979 331.11,964.53 335.11,960.53 339.11,960.53 343.11,964.53 343.11,979 347.11,983 351.11,983 355.11,979 355.11,964.53 359.11,960.53 363.11,960.53 367.11,964.53 367.11,979 371.11,983 387,983 476.78,893.22 v1(477.27,893.22)
  other v1: 477.27,893.22 155.77,974.71
SRST: U2.T2 U5.U21 | length 483.5
  Top Layer w4: U2.T2@101.87,754.58 101.87,743.13 141.64,703.36 306.29,703.36 310.29,707.36 310.29,718 314.29,722 318.29,722 322.29,718 322.29,707.36 326.29,703.36 330.29,703.36 334.29,707.36 334.29,718 338.29,722 342.29,722 346.29,718 346.29,707.36 350.29,703.36 485.39,703.36 U5.U21@496.9,714.87
SVREF: C58.2 C59.2 C60.2 R10.1 R11.2 U2.H1 U2.M8 | length 560.4
  Top Layer w8: v1(202.27,907.53) 213.58,896.22 275.2,896.22 U2.M8@290.87,880.58
  Top Layer w12: v1(49.06,999.53) 64.04,999.53 U2.H1@70.72,1006.21
  PWR3 w12: v1(49.06,999.53) 49.06,950.94 68.47,931.53 163.27,931.53 187.27,907.53 v1(202.27,907.53)
  Bottom Layer w9: R11.2@23,981.01 30.53,981.01 v1(49.06,999.53) 29.59,1019 R10.1@24,1019
  Bottom Layer w10: C60.2@-16,981.01 23,981.01 R11.2@24,980 ; C59.2@-16,1017.99 23,1017.99 R10.1@24,1019 ; v1(202.27,907.53) 213.8,896 244.99,896 C58.2@259.99,911
SWE: U2.L3 U5.V20 | length 602.6
  Top Layer w4: U2.L3@133.71,911.72 156,889.43 v1(156,878) ; v1(393.27,752.22) 405.12,740.37 U5.V20@471.25,740.37
  PWR3 w4: v1(156,878) 145,867 145,823 157.06,810.94 162.72,810.94 169.75,817.97 175.4,817.97 178.23,815.14 178.23,809.49 171.2,802.46 171.2,796.8 174.03,793.97 179.69,793.97 196.91,811.19 202.57,811.19 205.39,808.37 205.39,802.71 188.17,785.49 188.17,779.83 ; 188.23,779.77 198,770 230,770 246,786 286.29,786 290.29,782 290.29,774.16 294.29,770.16 298.29,770.16 302.29,774.16 302.29,782 306.29,786 310.29,786 314.29,782 314.29,774.16 318.29,770.16 322.29,770.16 326.29,774.16 326.29,782 330.29,786 339.27,786 373.05,752.22 v1(393.27,752.22)
  other v1: 393.27,752.22
TV_OUT: H2.31 U5.J21 | length 889.6
  Top Layer w10: v1(487.5,12.5) 490,15 490,155 707.5,372.5 707.5,564.76 707.85,565.11 707.85,579.89 707.5,580.24 707.5,671.86 707.5,708.83 U5.J21@701.57,714.77
  Bottom Layer w10: H2.31@479.76,-77.76 479.76,2.68 487.5,10.42 v1(487.5,12.5)
UART1_CTS: U3.7 U5.B3 | length 680.8
  Top Layer w4: U5.B3@880.7,1175.4 966.6,1175.4 1021,1121 1111,1121 1249.38,982.62 U3.7@1249.38,750.4
UART1_RTS: U3.8 U5.C4 | length 688.2
  Top Layer w4: U5.C4@855.11,1149.81 867.3,1162 963,1162 1018,1107 1106,1107 1233.63,979.37 U3.8@1233.63,750.4
UART1_RX: U3.10 U5.B4 | length 617.8
  Top Layer w4: U5.B4@880.7,1149.81 893.5,1137 955,1137 1015,1077 1099,1077 1202.13,973.87 U3.10@1202.13,750.4
UART1_TX: U3.9 U5.A4 | length 609.3
  Top Layer w4: U5.A4@906.29,1149.81 960.19,1149.81 1018,1092 1102,1092 1217.88,976.12 U3.9@1217.88,750.4
USB_ID: H2.40 U5.A2 | length 1767.3
  Top Layer w5: U5.A2@906.29,1200.99 979.01,1200.99 1000,1180 v1(1011,1180)
  Inner4 w5: v1(325,135.35) 327.43,137.78 327.43,150.38 344.55,167.5 677.5,167.5 1064,554 1064,844 1116,896 1116,942.29 1114.65,943.64 1114.65,956.36 1116,957.71 1116,1010 1116,1075 v1(1011,1180)
  Bottom Layer w5: v1(325,135.35) 325,131.91 333.63,123.28 333.63,121.37 336.56,118.44 346.56,118.44 H2.40@353.78,111.22
VBUS: C2.1 C7.1 C10.1 D1.2 H1.1 H1.3 H2.22 H2.33 R54.2 U1.2 U1.17 U1.20 | length 3330.6
  Top Layer w20: v1(448.27,-1.73) 462.2,12.2 D1.2@462.2,207 ; C7.1@1319.19,272.6 1319.19,271.81 1314.23,266.85 C7.1@1313.44,266.85 1314.22,266.07 1370.64,266.07 1374.81,270.25 1393.95,270.25 1396.7,273 1509.9,273 1510.3,272.6 1579.94,272.6 1617.5,310.16 v1(1617.5,365.08)
  Bottom Layer w20: v1(336.3,40) 295,81.3 295,265 110,450 40,450 -102.5,592.5 -102.5,1311.39 256.62,1670.52 353.64,1670.52 353.64,1692.5 353.8,1692.66 H1.1@353.8,1707.76 H1.3@385.29,1707.76 ; v1@342.21,45.91 348.12,40 v1(385,40) v1(406.56,40) v1(437.5,40) v1(465,40) ; H2.33@448.27,-77.76 448.27,23.27 v1(465,40) ; H2.22@637.24,111.22 637.24,74.13 629.6,66.49 629.6,58.17 611.42,40 v1(465,40) ; v1(1617.5,365.08) 1638.08,344.5 R54.2@1692.5,344.5
  other v1: 557.5,40 590,40 1305,47.5 1282.39,142.12 1298.16,157.87 1265.55,158.95 1280.9,174.3 1229,204.5 1238,230.5 1264,230.5 1290.53,230.5
VCC_DRAM: C11.1 C13.1 C17.2 C19.2 C30.2 C31.2 C32.2 C33.2 C34.2 C35.2 C36.2 C37.2 C38.2 C39.2 C40.2 C41.2 C42.2 C43.2 C44.2 C45.2 C46.2 C47.2 C48.2 C49.2 C50.2 C51.2 C52.2 C53.2 C54.2 C55.2 C56.2 C57.2 C61.2 C62.2 C63.2 C64.2 C65.2 L3.2 R10.2 R53.2 U1.4 U2.A1 U2.A8 U2.B2 U2.C1 U2.C9 U2.D2 U2.D9 U2.E9 U2.F1 U2.G7 U2.H2 U2.H9 U2.K2 U2.K8 U2.N1 U2.N9 U2.R1 U2.R9 | length 6573.9
  Top Layer w6: v1(40,916) 51.53,927.53 79.27,927.53 94.95,943.22 U2.K2@102.21,943.22 ; U2.K8@291.19,943.22 306.5,958.53 v1(307.27,958.53) ; U2.C9@318.11,1163.69 U2.C9@322.68,1163.69 ; L3.2@1125.52,268.42 1163,230.94 1163,191.5 1185.42,169.08 U1.4@1185.42,149.52
  Top Layer w8: U2.F1@70.72,1069.2 86.27,1053.65 86.27,1022.16 U2.H2@102.21,1006.21 ; U2.N9@322.37,849.08 358.92,849.08 376.5,831.5 ; U2.C9@322.68,1163.69 337.79,1163.69 353.46,1148.02 ; v1(367,822) 376.5,831.5 ; C32.2@392.99,830 391.5,831.5 376.5,831.5
  Top Layer w9: v1(38,1069) 69.79,1069 U2.F1@70.37,1069.58 ; v1(50,775) 59.29,775 U2.R1@70.37,786.08
  Top Layer w10: v1(51,855) 56.92,849.08 U2.N1@70.37,849.08 ; v1(242.75,1037.71) U2.G7@259.69,1037.71 ; U2.R9@322.37,786.08 361.45,786.08 v1(361.79,785.74)
  Top Layer w12: U2.C1@70.72,1163.69 v1(86.79,1147.61) U2.D2@102.21,1132.19 ; U2.A1@70.72,1226.68 v1(86,1211.4) U2.B2@102.21,1195.19 ; U2.H9@322.68,1006.21 v1(358.81,1006.21) 394.94,1006.21 434,1045.27 v1(434,1128) ; U2.E9@322.68,1101.08 U2.D9@322.68,1132.19 ; 353.46,1148.02 375.98,1148.02 v1(392,1132)
  Top Layer w13: C54.2@-15.99,803.54 C48.2@-15.99,761.77 -2.76,775 v1(50,775) ; C57.2@-15.99,887.08 C50.2@-15.99,845.31 -6.3,855 v1(51,855) ; C55.2@-15.99,970.62 C56.2@-15.99,928.85 27.15,928.85 v1(40,916) ; C49.2@-15.99,1012.38 C35.2@-15.99,1054.15 0.15,1054.15 15,1069 v1(38,1069) ; C42.2@-15.99,1095.92 C36.2@-15.99,1137.69 36.69,1137.69 v1(49,1150) ; C43.2@-15.99,1179.46 C53.2@-15.99,1221.23 13.21,1221.23 U2.C1@70.37,1164.08 ; v1(272,1256) 290.87,1237.13 U2.A8@290.87,1227.08 ; U2.E9@322.37,1101.08 322.68,1101.08 373.08,1101.08 392,1120 v1(392,1132)
  PWR3 w23: v1(40,916) 11,945 11,1042 v1(38,1069) 52,1083 131,1083 176.29,1037.71 v1(242.75,1037.71) 274.25,1006.21 v1(358.81,1006.21) ; v1(49,1150) 86,1187 v1(86,1211.4) ; v1(50,775) 51,776 v1(51,855) ; v1(222.5,277.5) 222.5,199.41 360.65,61.26 360.65,-68.15 385,-92.5 1360,-92.5 1382.5,-70 1486.53,-70 1500,-56.53 1500,77.5 1480,97.5 1275,97.5 1055,317.5 v1(1055,322.5)
  Inner4 w23: v1(50,775) -7.62,717.38 -7.62,507.62 v1(222.5,277.5)
  Bottom Layer w4: 333.31,1010.11 337.21,1006.21 ; v1@356.19,1014.53 356.19,1008.83 v1(358.81,1006.21)
  Bottom Layer w9: C34.2@24.01,1097 38,1083.01 38,1080.01 ; v1(242.75,1037.71) 259.99,1020.47 C41.2@259.99,1018 ; C63.2@300.01,982 313,982 ; v1(361.79,785.74) 373.05,797 C30.2@385.99,797
  Bottom Layer w13: C46.2@23,1207 22.99,1168 C40.2@24,1167 32,1167 v1(49,1150) ; C38.2@24.01,749 C61.2@24,786 ; C34.2@24.01,1094 24.01,1097 C64.2@24.01,1131 43.01,1150 v1(49,1150) ; v1(38,1069) 38,1080.01 ; v1(40,916) 24,900 C31.2@24.01,862 C61.2@24,786 ; v1(50,775) 34.99,775 C61.2@24,786 ; v1(86.79,1147.61) 74.41,1160 59,1160 v1(49,1150) ; v1(272,1256) 292.11,1256 C51.2@294.27,1258.15 ; C47.2@427.99,1068 C65.2@427.99,1102 434,1108.01 v1(434,1128)
  Bottom Layer w15: C63.2@300.01,982 307.27,974.74 v1(307.27,958.53) ; 313,982 337.21,1006.21 v1(358.81,1006.21) 382.79,1006.21 389,1000 389,911.01 C52.2@386.99,909 C39.2@386.99,835 C39.2@385.99,834 ; v1(367,822) 373.99,822 C39.2@385.99,834 ; C30.2@385.99,797 C39.2@385.99,834
  Bottom Layer w23: v1(86,1211.4) 86,1231 111,1256 v1(272,1256) ; 333.31,1010.11 R53.2@333.31,1038.57 ; v1(392,1132) 402,1122 428,1122 v1(434,1128)
VCC_DRAM_CPU: C18.2 C20.2 R53.1 U5.L9 U5.L10 U5.L11 U5.L12 U5.L13 | length 487.8
  Top Layer w8: v1(635,957) v1@636.7,957 ; v1(635,983) 648.27,996.27 U5.L10@650.38,996.27 v1@636.64,1010 ; v1(635,1010) v1@636.64,1010 ; U5.L13@650.38,919.5 638.87,931 636.29,931 U5.L12@650.38,945.09 638.46,957 v1@636.7,957 ; U5.L11@650.38,970.68 v1@636.7,957 ; U5.L9@650.38,1021.86 638.52,1010 v1@636.64,1010
  PWR3 w15: v1(455,1007.5) 517.5,1007.5 531,994
  PWR3 w23: 531,994 624,994 v1(635,983)
  Bottom Layer w8: v1(635,957) 627.99,964.01 C18.2@619.98,964.01 635,979.04 v1(635,983)
  Bottom Layer w15: R53.1@369.31,1038.57 369.31,1039.73 387.79,1058.21 400.22,1058.21 412.43,1046 414,1046 452.5,1007.5 v1(455,1007.5)
VDD_CPU: C8.1 C9.1 C24.2 C25.2 L2.2 U1.1 U5.H8 U5.H9 U5.J8 U5.J9 U5.J10 U5.J11 U5.L8 | length 463.1
  Top Layer w6: U1.1@1232.62,149.52 1232.62,168.12 1266,201.5 1360.31,201.5 L2.2@1360.44,201.37
  Top Layer w8: U5.L8@650.38,1047.45 663.93,1061 688.01,1061 U5.J8@701.57,1047.45 v1(714.36,1034.65) ; U5.J11@701.57,970.68 701.57,971.04 v1(688.77,983.84) 689.14,983.84 U5.J10@701.57,996.27 ; U5.H8@727.16,1047.45 v1(714.36,1034.65) ; U5.J10@701.57,996.27 v1(714.23,1008.94) U5.H9@727.16,1021.86 v1(714.36,1034.65) ; U5.J10@701.57,996.27 701.57,996.45 v1(688.77,1009.25) 688.96,1009.25 U5.J9@701.57,1021.86 v1(714.36,1034.65)
  Top Layer w18: v1@1402.5,240 v1(1405,240) ; v1(1503.97,207.5) C9.1@1506.12,205.35
  Bottom Layer w15: v1(688.77,983.84) 688.77,972.23 C24.2@694.85,966.15 ; C25.2@689.01,1054 695.01,1054 v1(714.36,1034.65)
  other v1: 1400,205 1445.44,205.7 1445,242.5 1502.5,242.5
VDD_GPU: C4.1 C6.1 C21.2 C22.2 C23.2 L1.2 U1.16 U5.F8 U5.F9 U5.F10 U5.F11 U5.F12 U5.F13 U5.G8 U5.G9 U5.G10 U5.G11 U5.G12 | length 447.5
  Top Layer w6: U1.16@1260.22,58.92 1276.58,58.92 1281,54.5 1281,34.5 1292,23.5 1344.11,23.5 L1.2@1361.44,6.17
  Top Layer w8: U5.G11@751.46,971.97 U5.G11@752.75,970.68 ; U5.F13@778.34,919.5 777.5,919.5 v1(765,932) ; U5.F12@778.34,945.09 765.25,932 v1(765,932) ; U5.F11@778.34,970.68 U5.G11@752.75,970.68 ; U5.F10@778.34,996.27 U5.G10@754.73,996.27 ; U5.F9@778.34,1021.86 U5.G9@754.86,1021.86 ; U5.F8@778.34,1047.45 U5.G8@752.75,1047.45 752.75,1044.75 751.75,1044.75 v1(741,1034) 751.75,1023.25 U5.G9@752.75,1023.25 ; U5.G11@752.75,967.75 v1(742,957) 752.75,946.25 U5.G12@752.75,945.09 765,932.83 v1(765,932) ; U5.G11@752.75,967.75 U5.G11@752.75,970.68 ; U5.G11@752.75,967.75 754.21,969.21 U5.G11@752.75,970.68 ; U5.G11@752.75,970.68 752.75,973.25 750.75,973.25 v1(741,983) U5.G10@752.75,994.75 ; U5.G10@752.75,994.75 754.27,996.27 U5.G10@754.73,996.27 ; U5.G10@752.75,994.75 U5.G10@752.75,998.25 ; U5.G10@752.75,998.25 v1(742,1009) U5.G9@752.75,1019.75 ; U5.G10@752.75,998.25 U5.G10@754.73,996.27 ; U5.G9@752.75,1019.75 U5.G9@754.86,1021.86 ; U5.G9@752.75,1019.75 U5.G9@752.75,1023.25 ; U5.G9@752.75,1023.25 754.14,1021.86 U5.G9@754.86,1021.86
  other v1: 1353,-23.5 1393,-23.5 1431,-23.5 1468,-23.5
WHXI: C80.1 U3.3 X1.1 | length 306.8
  Top Layer w4: U3.3@1312.37,750.4 1312.37,766.37 1362,816 1362,914 1372,924 1405,924 1426,903 X1.1@1426,900 1428,898 C80.1@1468.01,898
WHXO: C85.1 U3.4 X1.3 | length 359.4
  Top Layer w4: U3.4@1296.62,750.4 1296.62,768.62 1352,824 1352,932 1370,950 X1.3@1386,950 1418,982 1446,982 1468.01,959.99 C85.1@1468.01,951
WL_REG_ON: U3.24 U5.B10 | length 989
  Top Layer w4: U5.B10@880.7,996.27 895.43,1011 939,1011 v1(954,996) ; v1(1121,453) 1148.65,453 1151.85,456.2 1199.2,456.2 1249.38,506.38 U3.24@1249.38,553.6
  Bottom Layer w4: v1(954,996) 966,1008 1038,1008 1061,985 1061,901 1028,868 1028,721 1041,708 1041,658 1071,628 1071,550 1098,523 1098,497 1121,474 v1(1121,453)
pads on no net: H1. H2. U1.10 U1.14 U3.18 U3.27 U3.29 U3.31 U3.32 U3.33 U3.34 U3.39 U4.A1 U4.A2 U4.A7 U4.A8 U4.A9 U4.A10 U4.A11 U4.A12 U4.A13 U4.A14 U4.B1 U4.B7 U4.B8 U4.B9 U4.B10 U4.B11 U4.B12 U4.B13 U4.B14 U4.C1 U4.C3 U4.C5 U4.C7 U4.C8 U4.C9 U4.C10 U4.C11 U4.C12 U4.C13 U4.C14 U4.D1 U4.D2 U4.D3 U4.D4 U4.D12 U4.D13 U4.D14 U4.E1 U4.E2 U4.E3 U4.E5 U4.E8 U4.E9 U4.E10 U4.E12 U4.E13 U4.E14 U4.F1 U4.F2 U4.F3 U4.F10 U4.F12 U4.F13 U4.F14 U4.G1 U4.G2 U4.G3 U4.G10 U4.G12 U4.G13 U4.G14 U4.H1 U4.H2 U4.H3 U4.H12 U4.H13 U4.H14 U4.J1 U4.J2 U4.J3 U4.J12 U4.J13 U4.J14 U4.K1 U4.K2 U4.K3 U4.K6 U4.K7 U4.K10 U4.K12 U4.K13 U4.K14 U4.L1 U4.L2 U4.L3 U4.L12 U4.L13 U4.L14 U4.M1 U4.M2 U4.M3 U4.M7 U4.M8 U4.M9 U4.M10 U4.M11 U4.M12 U4.M13 U4.M14 U4.N1 U4.N3 U4.N6 U4.N7 U4.N8 U4.N9 U4.N10 U4.N11 U4.N12 U4.N13 U4.N14 U4.P1 U4.P2 U4.P7 U4.P8 U4.P9 U4.P10 U4.P11 U4.P12 U4.P13 U4.P14 U5.A8 U5.B2 U5.B8 U5.B9 U5.C3 U5.C11 U5.C16 U5.D1 U5.D14 U5.F4 U5.G2 U5.L18 U5.N7 U5.N10 U5.P7 U5.P9 U5.P10 U5.P12 U5.R9 U5.R12 U5.T5 U5.T6 U5.T7 U5.T9 U5.T11 U5.T12 U5.U5 U5.U8 U5.U9 U5.U10 U5.U11 U5.U12 U5.V8 U5.V10

## Polygon pours and split planes (outlines as drawn)
GND on Inner4 "Inner4-GND 1" (solid, remove dead copper, pour order 34): -946.5,2101 2040.5,2101 2040.5,-469 -946.5,-469
GND on Inner4 "Inner4-GND 2" (solid, remove dead copper, pour order 20): 661,751 578,668 98,668 8,758 8,1186 131,1309 565,1309 661,1213
GND on Inner4 "Inner4-GND" (solid, remove dead copper, pour order 14): 393,1287.18 983,1287.18 983,651.98 393,651.98
VBUS on Inner4 "VBUS_L05_P022" (solid, remove dead copper, pour order 22): 1010,75 1010,87.5 1230,307.5 1477.5,307.5 1522.5,262.5 1522.5,-22.5 1482.5,-57.5 1460,-60 320,-60 290,-30 290,55 310,75
GND on Bottom Layer "Bottom Layer-GND" (solid, remove dead copper, pour order 18): -994.57,2158.07 1992.43,2158.07 1992.43,-411.93 -994.57,-411.93
GND on Bottom Layer "Bottom Layer-GND 1" (solid, remove dead copper, pour order 15): 393.77,1310.4 983.77,1310.4 983.77,675.2 393.77,675.2
GND on GND1 "Inner1-GND" (solid, remove dead copper, pour order 33): -985.09,2147.35 2001.91,2147.35 2001.91,-422.65 -985.09,-422.65
VDD_CPU on GND1 "VDD_CPU_L02_P016" (solid, remove dead copper, pour order 16): 722.5,952.5 627.5,952.5 640,940 645,940 642.5,942.5 645,945 645,1110 722.5,1187.5 1060,1187.5 1060,392.5 1150,302.5 1152.5,305 1512.5,305 1512.5,287.5 1555,245 1555,137.5 1537.5,120 1007.5,120 897.5,230 897.5,1052.5 870,1080 865,1075 722.5,1075
VDD_GPU on GND1 "VDD_GPU_L02_P032" (solid, remove dead copper, pour order 32): 733.28,1053.58 732.5,1052.79 732.5,-30 802.5,-100 1517.5,-100 1552.56,-64.94 1552.56,33.61 1548.89,33.61 1477.5,105 967.35,105 866.56,205.79 866.56,1052.61
3V3 on PWR3 "Inner3-3V3" (solid, remove dead copper, pour order 37): -960.5,2120.37 2026.5,2120.37 2026.5,-449.63 -960.5,-449.63
3V3_WIFI on PWR3 "3V3_WIFI_L04_P036" (solid, remove dead copper, pour order 36): 1003,916.82 1005,914.82 1005,402.5 1560,402.5 1565,397.5 1585,417.5 1585,922.5
3V3_CPU on PWR3 "3V3_CPU_L04_P019" (solid, remove dead copper, pour order 19): -127.5,410 830,410 982.5,562.5 982.5,1405 -127.5,1405
3V3_EMMC on PWR3 "3V3_EMMC_L04_P035" (solid, remove dead copper, pour order 35): 1115,1543.79 1115,1017.5 1622.5,1017.5 1630,1010 1635,1015 1635,1546.29
3V3 on Inner2 "Inner2-GND" (solid, remove dead copper, pour order 17): -973.3,2134.55 2013.7,2134.55 2013.7,-435.45 -973.3,-435.45
GND on Top Layer "Top Layer-GND" (solid, remove dead copper, pour order 13): -1002,2166 1985,2166 1985,-404 -1002,-404

## Keep-outs
Bottom Layer:
  region net 3V3: 260.21,1194.96 492.85,1194.96 515.38,1172.44 515.38,1133.28 492.38,1110.28 261.53,1110.28 228.53,1143.28 228.53,1163.28
  region net 3V3: 106.47,927.53 156,878 156,845.64 169.64,832 169.64,792.36 264.64,697.36 589.4,697.36 606.81,714.77 606.81,758.5 580.68,784.63 373.37,784.63 250.47,907.53 202.27,907.53 135.09,974.71 77.71,974.71 63,960 63,937 72.47,927.53
Board Outline Layer:
  lines w10: -165.17,-28.04 ccw(c-27.37,-28.04) -27.37,-165.83 ; -165.17,-27.5 -165.17,1660 ; -165.17,1656.09 cw(c-27.37,1656.09) -27.37,1793.89 ; -42.5,-165.13 1656.09,-165.83 ccw(c1656.09,-28.04) 1793.89,-28.04 ; -42.5,1793.89 1656.09,1793.89 cw(c1656.09,1656.09) 1793.89,1656.09 ; 1793.93,-40 1795,1670

## Other copper
Top Layer:
  pour cut-out: 245,1282.5 142.25,1179.75 -10.25,1179.75 -25,1165 -15.99,1155.99 -15.99,782.65 54.85,782.65 134.14,703.36 511.76,703.36 561.27,752.87 625,689.13 625,670 641,670 681.01,629.99 683.52,632.5 695,632.5 695,381.63 490,176.63 490,165 668.15,165 945.65,-112.5 1041.91,-112.5 1110,-44.41 1110,147.5 1107.5,147.5 897.5,357.5 837.5,357.5 837.5,773.94 995,931.45 1268.31,931.45 1268.31,948.31 1300.03,980.03 1300.03,1353.34 1284.16,1353.34 1152.5,1485 858.41,1485 612.39,1238.98 566.37,1285 497.5,1285
  pour cut-out: 1277.5,1332.5 1282.5,1327.5 1282.5,1157.5 1447.5,1157.5 1472.5,1182.5 1472.5,1335
  pour cut-out: 937,1080 937,893 999.5,830.5 1001.5,832.5 1210,832.5 1210,985 1110,1085
  pour cut-out: 450,1245 447.5,1242.5 447.5,735 886.06,735 886.85,734.22 890,737.37 890,1295 684,1295 675,1304 626.01,1255 450,1255
  region net VDD_CPU: 1362,182.5 1524,182.5 1524,241.12 1506.12,259 1402.5,259
  region net NetL3_1: 1205.02,133.72 1205,133.74 1205,229.5 1210,234.5 1210,301.5 1209,302.5 1171,302.5 1171,195.5 1197,169.5 1197,133.94 1197.22,133.72
  region net VBUS: 1212.92,133.72 1212.92,222.42 1239,248.5 1239,284.5 1330,284.5 1330,250.5 1290,210.5 1261,210.5 1221,170.5 1221,133.5 1213.14,133.5
  region net VBUS: 1244.42,118.02 1244.42,160.92 1273,189.5 1304,189.5 1313,180.5 1313,147.5 1283,117.5 1244.94,117.5
  region net NetL2_1: 1244.42,110.12 1286.62,110.12 1323,146.5 1323,155.5 1393,155.5 1394,156.5 1394,105.22 1391,102.22 1244.42,102.22
  region net NetL1_1: 1245,94.5 1392,94.5 1395,91.5 1395,51.5 1335,51.5 1300,86.5 1245,86.5
  region net VBUS: 1244.42,70.72 1280.78,70.72 1290,61.5 1290,38.5 1296,32.5 1315.17,32.5 1319.44,36.77 1319.44,57.06 1298,78.5 1244,78.5 1244,71.14
  region net VDD_GPU: 1327,26.5 1327,-26.5 1340,-39.5 1510,-39.5 1523,-26.5 1523,23.5 1398,23.5 1395,26.5
  region net VCC_DRAM: 1145,286.5 1145,358.5 1139,364.5 1056,364.5 1042,350.5 1042,268.5 1125.44,268.5 1125.52,268.42 1126.92,268.42
  region net 1V8: 1228.01,47.5 1227.72,-8.22 1247,-27.5 1247,-45.5 1269,-45.5 1269,3.5 1237,35.5 1237,47.5
Inner2:
  pour cut-out: 191.68,1309.11 59.91,1177.33 51.29,1177.33 51.29,744.11 44.37,737.18 139.55,642 495.65,642 499.18,638.47 613.72,753 1114.5,753 1047.5,820 1047.5,1507.5 897.5,1657.5 894.99,1654.99 657.51,1654.99 657.51,1385.01 569.84,1297.34 515.2,1297.34
PWR3:
  pour cut-out: 117.29,1290.67 100.36,1290.67 -20,1170.32 -20,787.5 22.84,787.5 125.84,684.5 126.02,684.68 525.42,684.68 525.42,725.42 635,835 637.5,832.5 750,832.5 750,1250 691.5,1308.5 536.5,1308.5

## Silkscreen, mask and mechanical layers (free items; w line width, h text height)
Top Silkscreen Layer:
  text "EMMC" at 1456,1483.5 h30
  text "DDR3" at 238.5,681 h30
  text "H616" at 811,646 h30
  text "FAN" at 230.5,428 h15
  text "RJ45" at 1631,32 h15 r90
Mechanical Layer:
  lines w10: -164.95,-27.81 ccw(c-27.15,-27.81) -27.15,-165.6 ; -164.95,-27.5 -164.95,1660 ; -164.95,1656.33 cw(c-27.15,1656.33) -27.15,1794.12 ; -37.5,-165.6 1665,-165.6 ; -27.5,1794.12 1656.31,1794.12 cw(c1656.31,1656.33) 1794.11,1656.33 ; 1656.31,-165.6 ccw(c1656.31,-27.81) 1794.11,-27.81 ; 1794.18,1672.5 1795,-32.5
Mechanical 6:
  circle w8: c865.78,1373.66 r39.37
  lines w6: -25.77,482.11 958.48,482.11 958.48,1466.36 -25.77,1466.36 -25.77,482.11

## Text inside footprints (layer, text, board x,y; h text height)
C1: Top Silkscreen Layer "C12" at 1264,-151.5 h15 r90
C3: Top Silkscreen Layer "C12" at 1186.5,-151.5 h15 r90
C66: Top Silkscreen Layer "C12" at 1503,830.5 h15
C68: Top Silkscreen Layer "C12" at 1127.25,792.27 h15 r180
C69: Top Silkscreen Layer "C12" at 1258,394.5 h15 r270
C72: Top Silkscreen Layer "C12" at 1298,397 h15 r270
C84: Top Silkscreen Layer "C12" at 1338,399.5 h15 r270
C92: Bottom Silkscreen Layer "C12" at 788.26,769.73 h15
C93: Bottom Silkscreen Layer "C12" at 788.26,809.73 h15
C94: Top Silkscreen Layer "C12" at 1115.5,972 h15 r270
C95: Bottom Silkscreen Layer "C12" at 795.5,695.5 h15 r270
C96: Bottom Silkscreen Layer "C12" at 984.5,808 h15
C97: Bottom Silkscreen Layer "C12" at 763.26,915 h15 r45
C98: Bottom Silkscreen Layer "C12" at 945.5,964.5 h15 r180